# Altium PCB MiniTV.PcbDoc
Units mm, origin at the board's own origin, x right, y up, seen from the top; angles counter-clockwise.
Board outline 70.75 x 58.75 mm, 2 copper layers (Top Layer, Bottom Layer), stack 1.571 mm thick; 14 components, 15 nets, 76 pads, 1306 vias.
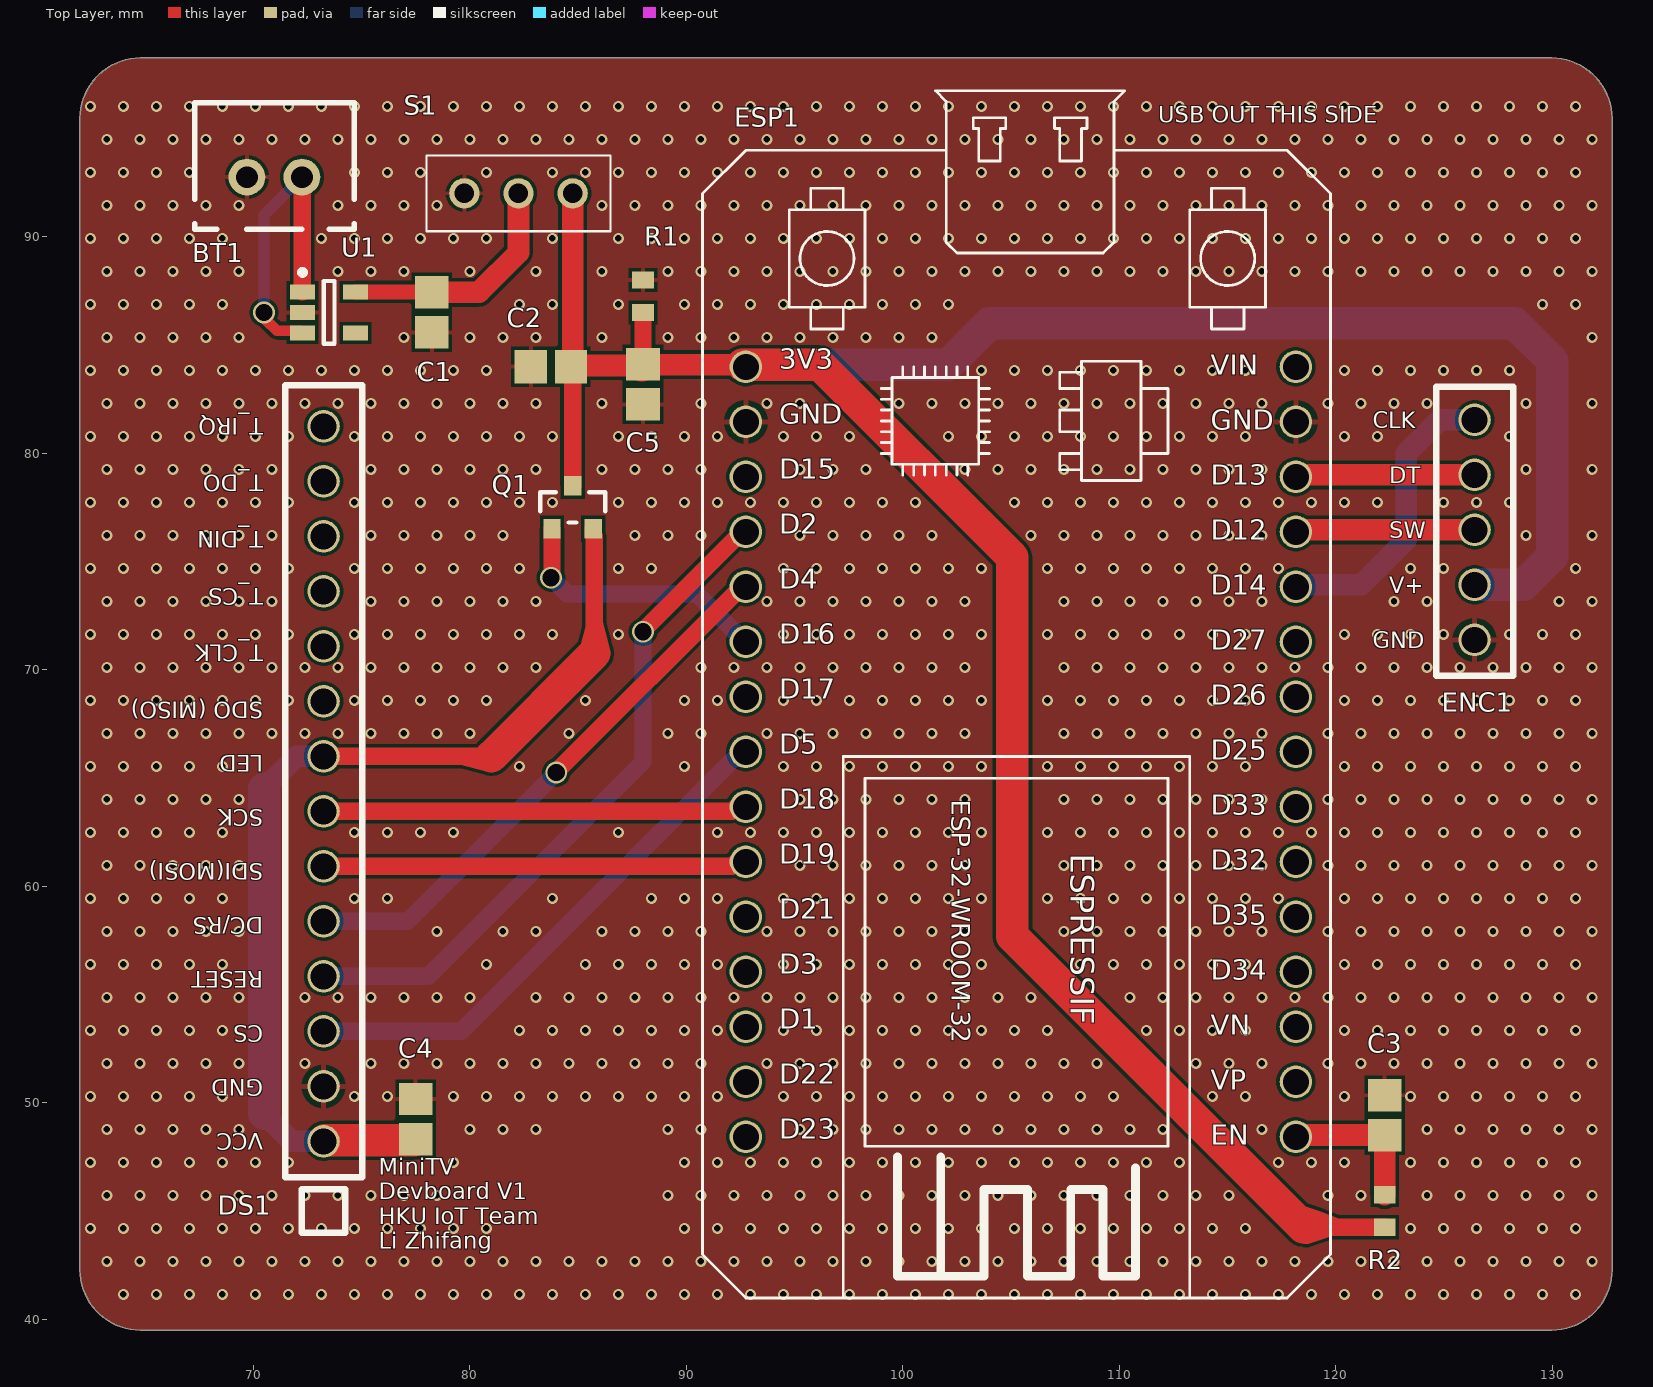
[diagram p0: Top Layer view]
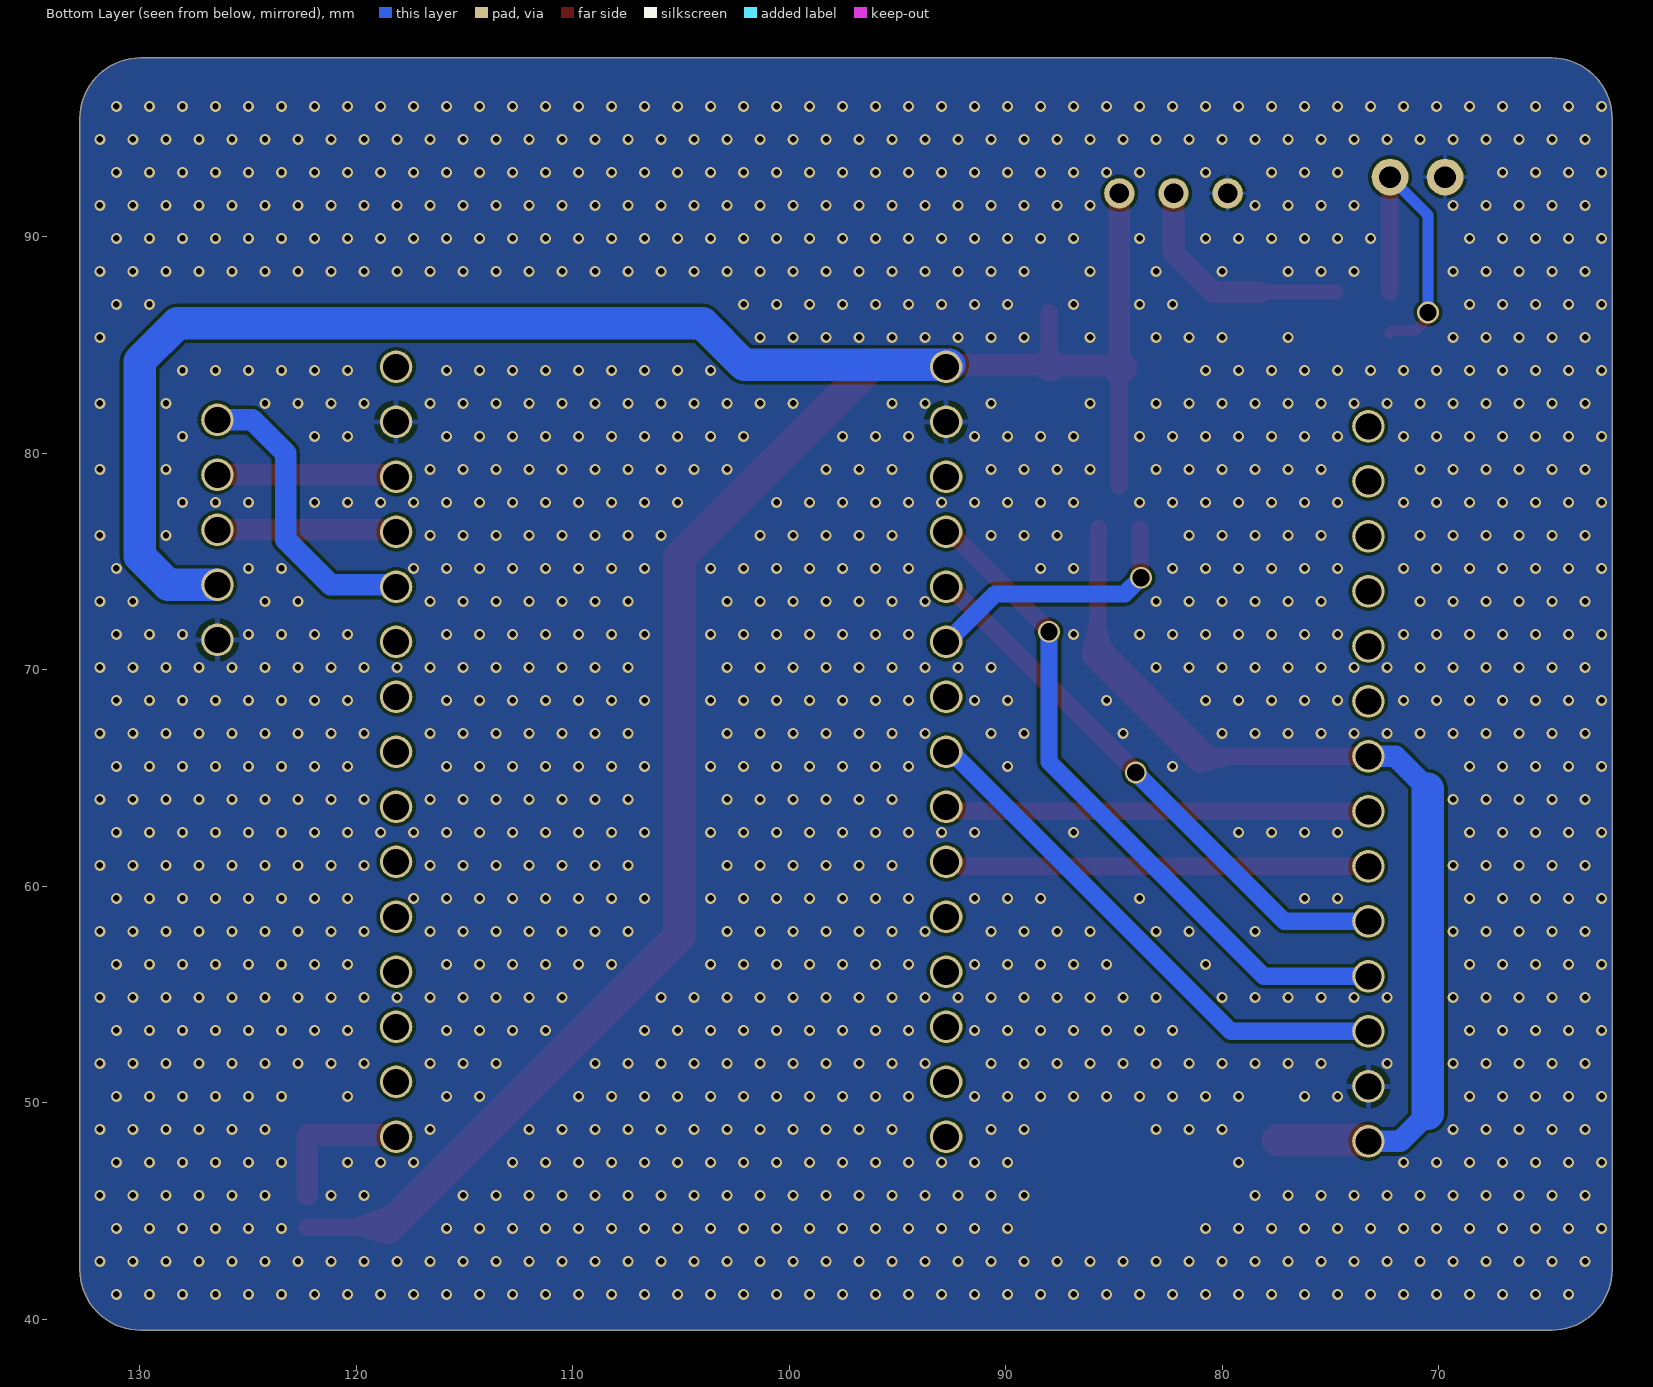
[diagram p1: Bottom Layer view, seen from below]

## Layer stack, top to bottom
Top Solder: solder mask 0.0102, Solder Resist, Dk 3.5
Top Layer: signal copper 0.0356
Dielectric 1: dielectric 1.5, FR-4, Dk 4.8
Bottom Layer: signal copper 0.0356
Bottom Solder: solder mask 0.0102, Solder Resist, Dk 3.5

## Board outline
62,42.29 62,95.46 cw(c64.79,95.46) 64.79,98.25 129.96,98.25 cw(c129.96,95.46) 132.75,95.46 132.75,42.29 cw(c129.96,42.29) 129.96,39.5 64.79,39.5 cw(c64.79,42.29)

## Design rules (kind name [scope] priority, off if disabled: settings)
Clearance [All] p1: gap=0.15 ignorepadtopadclearanceinfootprint=FALSE
DiffPairsRouting [All] p1: maxlimit=1 minlimit=0.127 mostfreqgap=0.2 toplayer_minwidth=0.127 toplayer_maxwidth=0.2 toplayer_prefwidth=0.2 bottomlayer_minwidth=0.127 bottomlayer_maxwidth=0.2 bottomlayer_prefwidth=0.2 maxuncoupledlength=12.7
Height [All] p1: minheight=0 maxheight=500 prefheight=12.7
HoleSize [All] p1: absolutevalues=TRUE maxlimit=6.3 minlimit=0.025 maxpercent=80.000 minpercent=20.000
MinimumSolderMaskSliver [All] p1: minsoldermaskwidth=0.04
PolygonConnect CertainComponents [InComponent('C0','C00') vs InNet('GND')] p1: connectstyle=Direct reliefconductorwidth=0.2 reliefentries=4 polygonreliefangle="90 Angle" airgapwidth=0.2 // force certain component to be conencted with relieft connection
PolygonConnect GND [InNet('GND')] p2: thpad.connectstyle=Relief thpad.reliefconductorwidth=0.2 thpad.reliefentries=4 thpad.polygonreliefangle="90 Angle" thpad.airgapwidth=0.15 smdpad.connectstyle=Relief smdpad.reliefconductorwidth=0.2 smdpad.reliefentries=4 smdpad.polygonreliefangle="90 Angle" smdpad.airgapwidth=0.15 via.connectstyle=Direct via.reliefconductorwidth=0.254 via.reliefentries=4 via.polygonreliefangle="90 Angle" via.airgapwidth=0.254
PolygonConnect [All] p3: connectstyle=Direct reliefconductorwidth=0.3 reliefentries=4 polygonreliefangle="90 Angle" airgapwidth=0.127
RoutingVias [All] p1: holewidth=0.3 width=0.5 viastyle="Through Hole" minholewidth=0.3 minwidth=0.5 maxholewidth=6 maxwidth=6.3
SilkToSilkClearance [All] p1: silktosilkclearance=0.04
SilkToSolderMaskClearance [IsPad] p1: minsilkscreentomaskgap=0.04 clearancetoexposedcopper=TRUE
SolderMaskExpansion [All] p1: expansion=0.102 istentingtop=FALSE
SupplyNets "Schematic Supply Nets_3" [InNet('GND')] p1: voltage=0.000
SupplyNets "Schematic Supply Nets_2" [InNet('VDD')] p2: voltage=0.000
SupplyNets "Schematic Supply Nets_1" [InNet('Vout')] p3: voltage=0.000
SupplyNets "Schematic Supply Nets" [InNet('3v3')] p4: voltage=0.000
Width [All] p1: maxlimit=3 minlimit=0.127 preferedwidth=0.2
24 further rules are at their usual default settings.

## Components (designator, comment, footprint, x,y, rotation, side; value= is the part's Value field where it differs from the comment)
BT1 "JST_XH_2P_2.54mm" JST_XH_2P_2.54mm 70.98,92.75 r0 top
C1 "10uF 0805" CAPC2013X145X48ML20T23 78.25,86.5 r90 top
C2 "4.7uF 0805" CAPC2013X145X48ML20T23 83.75,84 r0 top
C3 "4.7uF 0805" CAPC2013X145X48ML20T23 122.25,49.425 r90 top
C4 "0.1uF 0805" CAPC2013X145X48ML20T23 77.5,49.25 r270 top
C5 "0.1uF 0805" CAPC2013X145X48ML20T23 88,83.175 r270 top
DS1 "3.5inch TFT Display" "3.5inch SPI Display" 73.25,48.22 r180 top
ENC1 "Rotary Encoder" "Rotary Encoder" 126.405,81.54 r0 top
ESP1 "https://github.com/shridattdudhat" ESP32-DEVKITV1 92.75,83.99 r270 top
Q1 "(NPN) DMG2302UK-7" FP-SOT23-MFG 84.75,77.5 r90 top
R1 "100k 0603" RESC1608X55X25ML10T15 88,87.25 r90 top
R2 "10kΩ 0603" RESC1608X55X25ML10T15 122.25,45 r90 top
S1 "SS12D00G3" SS12D00G3 82.25,92 r0 top
U1 "ADP150AUJZ-3.3-R7" ADI-UJ-5_M 73.5,86.5 r0 top

## Footprints (in the part's own frame and the unit in brackets; to place one, negate y for a bottom-side part, rotate by r counter-clockwise, add the part's x,y. Pads: shape width x height; smd on the part's side, far side on the other; paste and mask are expansions set on the pad)
"3.5inch SPI Display" [mm]
  round 1.5 hole 1.2: 1(0,0) 2(0,-2.54) 3(0,-5.08) 4(0,-7.62) 5(0,-10.16) 6(0,-12.7) 7(0,-15.24) 8(0,-17.78) 9(0,-20.32) 10(0,-22.86) 11(0,-25.4) 12(0,-27.94) 13(0,-30.48) 14(0,-33.02)
  silkscreen extent -1.78,-34.93 1.78,1.65
ADI-UJ-5_M [mm] "SOT23, 5-Leads, Body 2.9x1.6mm, Pitch 0.95mm, IPC Low Density"
  rect 1.15x0.7 smd: 1(-1.225,0.95) 2(-1.225,0) 3(-1.225,-0.95) 4(1.225,-0.95) 5(1.225,0.95)
  silkscreen extent -1.35,-1.45 0.25,1.97, body extent -0.8,-1.45 0.8,1.45, height 1
CAPC2013X145X48ML20T23 [mm] "Chip Capacitor, 2-Leads, Body 2.00x1.25mm, IPC Low Density"
  rect 1.5x1.55 smd: 1(-0.925,0) 2(0.925,0)
  body extent -1.1,-0.72 1.1,0.72, height 1.45
ESP32-DEVKITV1 [mm]
  round 1.5 hole 1.2: 3V3(0,0) D1(30.48,0) D2(7.62,0) D3(27.94,0) D4(10.16,0) D5(17.78,0) D12(7.62,25.4) D13(5.08,25.4) D14(10.16,25.4) D15(5.08,0) D16(12.7,0) D17(15.24,0) D18(20.32,0) D19(22.86,0) D21(25.4,0) D22(33.02,0) D23(35.56,0) D25(17.78,25.4) D26(15.24,25.4) D27(12.7,25.4) D32(22.86,25.4) D33(20.32,25.4) D34(27.94,25.4) D35(25.4,25.4) EN(35.56,25.4) GND(2.54,25.4) GND@1(2.54,0) VIN(0,25.4) VN(30.48,25.4) VP(33.02,25.4)
  silkscreen extent -12.75,-2 43,27
FP-SOT23-MFG [mm]
  rect 0.9x0.8 smd paste+0 mask+0: 1(-1,0.95) 2(-1,-0.95) 3(1,0)
  silkscreen extent -0.7,-1.5 0.7,1.5, body extent -1.55,-1.6 1.55,1.6, height 0.25
JST_XH_2P_2.54mm [mm]
  round 1.7 hole 1 paste-2539.97 mask+0.051: 1(1.27,0) 2(-1.27,0)
  silkscreen extent -3.68,-2.41 3.68,3.43
RESC1608X55X25ML10T15 [mm] "Chip Resistor, 2-Leads, Body 1.60x0.80mm, IPC Low Density"
  rect 0.8x1 smd: 1(-0.75,0) 2(0.75,0)
  body extent -0.85,-0.45 0.85,0.45, height 0.55
"Rotary Encoder" [mm]
  round 1.5 hole 1.2: 1(0,0) 2(0,-2.54) 3(0,-5.08) 4(0,-7.62) 5(0,-10.16)
  silkscreen extent -1.78,-11.81 1.78,1.52
SS12D00G3 [mm]
  round 1.4 hole 0.9: 1(-2.5,0) 2(0,0) 3(2.5,0)
  silkscreen extent -4.25,-1.75 4.25,1.75, body extent -4.25,-1.75 4.25,1.75, height 6.88

## Part data
C1 C2 C3 C4 C5: library part CMP-2007-03205-1, Manufacturer=Vitramon, Part Number=VJ0805Y682KXAMT
ESP1: library part ESP32DEVKITV1, Package=ESP32-DEVKITV1, DeviceSetName=ESP32DEVKITV1, GateName_1=G$1, LibraryName=ESP32-DEVKITV1, SymbolName_1=ESP32-DEVKITV1
Q1: library part CMP-12801-000001-1, "MOSFET N-CH 20V 2.8A SOT23", Continuous Drain Current=2.8A, Drain To Source Breakdown Voltage=20V, Drain To Source Resistance=61mΩ, Gate To Source Voltage=12V, Input Capacitace At Vds="130pF @ 10V", Manufacturer="Diodes Inc.", Manufacturer Part Number=DMG2302UK-7, Max Forward Diode Voltage=1.2V, Max Junction Temp=+150°C, Package=SOT23, Power Dissipation=0.66W, Pulse Drain Current=12A, Temperature="-55°C to +150°C", Temperature Range Low=-55°C, Typ Forward Diode Voltage=0.7V, Automotive=Yes, Automotive Grade="Grade 0", Category=Trans, ComponentLink2Description=Datasheet, ComponentLink2URL=https://www.diodes.com/assets/Datasheets/DMG2302UK.pdf, Depletion Mode=False, Device Class L1="Discrete Semiconductors", Device Class L2=Transistors, Device Class L3=MOSFETs, Digikey Description="MOSFET N-CH 20V 2.8A SOT23", Drain To Source Voltage=20V, Footprint Url=https://www.diodes.com/assets/Package-Files/SOT23.pdf, Gate Charge At Vgs="2.8nC @ 10V", Height=1.1mm, Lead Free=Yes, Number Of Channels=1, Number Of N Channels=1, Octopart=https://octopart.com/dmg2302uk-7-diodes+inc.-73850182, Reverse Recovery Charge=0.5nC, Reverse Recovery Time=5.3ns, RoHS=TRUE, Rthja Max=192°C/W, Standoff Height=0.013mm, Temperature Range High=+150°C, Threshold Vgs Max=1V, Threshold Vgs Min=0.3V, Turn Off Delay Time=4.2ns, Turn On Delay Time=0.6ns
R1 R2: library part CMP-2000-04177-1, Manufacturer=Yageo, Part Number=RC0603FR-1020KL
S1: "Switch", Manufacturer_Name=Vimex, Datasheet Link=http://vimex.com/switches/techdocs/SS12D00-tech.pdf, Height=7mm, Manufacturer_Part_Number=SS12D00G3
U1: library part CMP-0786-00394-1, "Ultralow Noise, 150 mA CMOS Linear Regulator, 2.2 to 5.5 V Vin, 3.3 V Vout, Industrial, 5-pin SOT23 (UJ-5), Reel", Manufacturer="Analog Devices", Preset Vout Values (V)=3.3, Supply Current IGND @ Small Load=10uA, Code_JEDEC=MO-193-AB, ComponentLink1Description="Manufacturer URL", ComponentLink1URL=http://www.analog.com/en/index.html, ComponentLink2Description=Datasheet, ComponentLink2URL=http://www.analog.com/static/imported-files/data_sheets/ADP150.pdf, ComponentLink3Description="Package Specification", ComponentLink3URL=http:/www.analog.com/static/imported-files/packages/PKG_PDF/TSOT(UJ)/UJ_5.pdf, ComponentLink4Description="URL Link1", ComponentLink4URL="Product URL:http://www.analog.com/en/ADP150/productSearch.html", DatasheetVersion="Rev. A", Iout max=150mA, Mounting Technology="Surface Mount", PackageDescription="5-Pin Thin Small Outline Transistor Package, Body 2.9 x 1.6 mm, Pitch 0.95 mm", PackageReference=UJ-5, PackageVersion="100708-A, 10/2008", Packing=Reel, PartNumber=ADP150AUJZ-3.3-R7, Vin (max) (V)=5.5, Vin (min) (V)=2.2

## Via types
v1: diameter 0.5, hole 0.3, Top Layer to Bottom Layer, tented both sides, 1302 vias
v2: diameter 1, hole 0.8, Top Layer to Bottom Layer, tented both sides, 4 vias

## Nets (pads, with @x,y where several pads share a name; then routed paths per layer and width w, separated by ;. In a path a pad name is that pad's centre, name@x,y a point inside that pad or via, vN(x,y) a via of type N, cw(c..) or ccw(c..) an arc to the next point about the centre after c; other vN are vias at no path point)
3v3: C1.2 S1.2 U1.5 | length 11
  Top Layer w0.7: U1.5 78.225,87.45 C1.2
  Top Layer w1: C1.2 80.425,87.425 82.25,89.25 S1.2
GND: BT1.2 C1.1 C2.1 C3.2 C4.1 C5.2 DS1.2 ENC1.5 ESP1.GND ESP1.GND@1 R1.2 S1.1 U1.2
  other v1: 64.008,41.148 65.532,41.148 67.056,41.148 68.58,41.148 70.104,41.148 71.628,41.148 73.152,41.148 74.676,41.148 76.2,41.148 77.724,41.148 79.248,41.148 80.772,41.148 82.296,41.148 83.82,41.148 85.344,41.148 86.868,41.148 88.392,41.148 89.916,41.148 91.44,41.148 92.964,41.148 94.488,41.148 96.012,41.148 97.536,41.148 99.06,41.148 100.584,41.148 102.108,41.148 103.632,41.148 105.156,41.148 106.68,41.148 108.204,41.148 109.728,41.148 111.252,41.148 112.776,41.148 114.3,41.148 115.824,41.148 117.348,41.148 118.872,41.148 120.396,41.148 121.92,41.148 123.444,41.148 124.968,41.148 126.492,41.148 128.016,41.148 129.54,41.148 131.064,41.148 63.246,42.672 64.77,42.672 66.294,42.672 67.818,42.672 69.342,42.672 70.866,42.672 72.39,42.672 73.914,42.672 75.438,42.672 76.962,42.672 78.486,42.672 80.01,42.672 81.534,42.672 83.058,42.672 84.582,42.672 86.106,42.672 87.63,42.672 89.154,42.672 90.678,42.672 92.202,42.672 93.726,42.672 95.25,42.672 96.774,42.672 98.298,42.672 99.822,42.672 101.346,42.672 102.87,42.672 104.394,42.672 105.918,42.672 107.442,42.672 108.966,42.672 110.49,42.672 112.014,42.672 113.538,42.672 115.062,42.672 116.586,42.672 118.11,42.672 119.634,42.672 121.158,42.672 122.682,42.672 124.206,42.672 125.73,42.672 127.254,42.672 128.778,42.672 130.302,42.672 131.826,42.672 62.484,44.196 64.008,44.196 65.532,44.196 67.056,44.196 68.58,44.196 70.104,44.196 71.628,44.196 73.152,44.196 74.676,44.196 76.2,44.196 77.724,44.196 79.248,44.196 80.772,44.196 89.916,44.196 91.44,44.196 92.964,44.196 94.488,44.196 96.012,44.196 97.536,44.196 99.06,44.196 100.584,44.196 102.108,44.196 103.632,44.196 105.156,44.196 106.68,44.196 108.204,44.196 109.728,44.196 111.252,44.196 112.776,44.196 114.3,44.196 115.824,44.196 123.444,44.196 124.968,44.196 126.492,44.196 128.016,44.196 129.54,44.196 131.064,44.196 63.246,45.72 64.77,45.72 66.294,45.72 67.818,45.72 69.342,45.72 70.866,45.72 72.39,45.72 73.914,45.72 75.438,45.72 76.962,45.72 78.486,45.72 89.154,45.72 90.678,45.72 92.202,45.72 93.726,45.72 95.25,45.72 96.774,45.72 98.298,45.72 99.822,45.72 101.346,45.72 102.87,45.72 104.394,45.72 105.918,45.72 107.442,45.72 108.966,45.72 110.49,45.72 112.014,45.72 113.538,45.72 115.062,45.72 119.634,45.72 121.158,45.72 124.206,45.72 125.73,45.72 127.254,45.72 128.778,45.72 130.302,45.72 131.826,45.72 62.484,47.244 64.008,47.244 65.532,47.244 67.056,47.244 68.58,47.244 70.104,47.244 71.628,47.244 79.248,47.244 89.916,47.244 91.44,47.244 92.964,47.244 94.488,47.244 96.012,47.244 97.536,47.244 99.06,47.244 100.584,47.244 102.108,47.244 103.632,47.244 105.156,47.244 106.68,47.244 108.204,47.244 109.728,47.244 111.252,47.244 112.776,47.244 117.348,47.244 118.872,47.244 120.396,47.244 123.444,47.244 124.968,47.244 126.492,47.244 128.016,47.244 129.54,47.244 131.064,47.244 63.246,48.768 64.77,48.768 66.294,48.768 67.818,48.768 69.342,48.768 80.01,48.768 81.534,48.768 83.058,48.768 89.154,48.768 90.678,48.768 95.25,48.768 96.774,48.768 98.298,48.768 99.822,48.768 101.346,48.768 102.87,48.768 104.394,48.768 105.918,48.768 107.442,48.768 108.966,48.768 110.49,48.768 112.014,48.768 116.586,48.768 124.206,48.768 125.73,48.768 127.254,48.768 128.778,48.768 130.302,48.768 131.826,48.768 62.484,50.292 64.008,50.292 65.532,50.292 67.056,50.292 68.58,50.292 74.676,50.292 76.2,50.292 79.248,50.292 80.772,50.292 82.296,50.292 83.82,50.292 85.344,50.292 86.868,50.292 88.392,50.292 89.916,50.292 91.44,50.292 94.488,50.292 96.012,50.292 97.536,50.292 99.06,50.292 100.584,50.292 102.108,50.292 103.632,50.292 105.156,50.292 106.68,50.292 108.204,50.292 109.728,50.292 114.3,50.292 115.824,50.292 120.396,50.292 123.444,50.292 124.968,50.292 126.492,50.292 128.016,50.292 129.54,50.292 131.064,50.292 63.246,51.816 64.77,51.816 66.294,51.816 67.818,51.816 69.342,51.816 72.39,51.816 75.438,51.816 76.962,51.816 78.486,51.816 80.01,51.816 81.534,51.816 83.058,51.816 84.582,51.816 86.106,51.816 87.63,51.816 89.154,51.816 90.678,51.816 93.726,51.816 95.25,51.816 96.774,51.816 98.298,51.816 99.822,51.816 101.346,51.816 102.87,51.816 104.394,51.816 105.918,51.816 107.442,51.816 108.966,51.816 113.538,51.816 115.062,51.816 116.586,51.816 119.634,51.816 121.158,51.816 122.682,51.816 124.206,51.816 125.73,51.816 127.254,51.816 128.778,51.816 130.302,51.816 131.826,51.816 62.484,53.34 64.008,53.34 65.532,53.34 67.056,53.34 68.58,53.34 82.296,53.34 83.82,53.34 85.344,53.34 86.868,53.34 88.392,53.34 89.916,53.34 91.44,53.34 94.488,53.34 96.012,53.34 97.536,53.34 99.06,53.34 100.584,53.34 102.108,53.34 103.632,53.34 105.156,53.34 106.68,53.34 111.252,53.34 112.776,53.34 114.3,53.34 115.824,53.34 120.396,53.34 121.92,53.34 123.444,53.34 124.968,53.34 126.492,53.34 128.016,53.34 129.54,53.34 131.064,53.34 63.246,54.864 64.77,54.864 66.294,54.864 67.818,54.864 69.342,54.864 72.39,54.864 73.914,54.864 75.438,54.864 76.962,54.864 78.486,54.864 80.01,54.864 83.058,54.864 84.582,54.864 86.106,54.864 87.63,54.864 89.154,54.864 90.678,54.864 92.202,54.864 93.726,54.864 95.25,54.864 96.774,54.864 98.298,54.864 99.822,54.864 101.346,54.864 102.87,54.864 104.394,54.864 105.918,54.864 110.49,54.864 112.014,54.864 113.538,54.864 115.062,54.864 116.586,54.864 118.11,54.864 119.634,54.864 121.158,54.864 122.682,54.864 124.206,54.864 125.73,54.864 127.254,54.864 128.778,54.864 130.302,54.864 131.826,54.864 62.484,56.388 64.008,56.388 65.532,56.388 67.056,56.388 68.58,56.388 80.772,56.388 85.344,56.388 86.868,56.388 88.392,56.388 89.916,56.388 91.44,56.388 94.488,56.388 96.012,56.388 97.536,56.388 99.06,56.388 100.584,56.388 102.108,56.388 103.632,56.388 108.204,56.388 109.728,56.388 111.252,56.388 112.776,56.388 114.3,56.388 115.824,56.388 120.396,56.388 121.92,56.388 123.444,56.388 124.968,56.388 126.492,56.388 128.016,56.388 129.54,56.388 131.064,56.388 63.246,57.912 64.77,57.912 66.294,57.912 67.818,57.912 69.342,57.912 78.486,57.912 81.534,57.912 83.058,57.912 86.106,57.912 87.63,57.912 89.154,57.912 90.678,57.912 93.726,57.912 95.25,57.912 96.774,57.912 98.298,57.912 99.822,57.912 101.346,57.912 102.87,57.912 107.442,57.912 108.966,57.912 110.49,57.912 112.014,57.912 113.538,57.912 115.062,57.912 116.586,57.912 119.634,57.912 121.158,57.912 122.682,57.912 124.206,57.912 125.73,57.912 127.254,57.912 128.778,57.912 130.302,57.912 131.826,57.912 62.484,59.436 64.008,59.436 65.532,59.436 67.056,59.436 68.58,59.436 74.676,59.436 76.2,59.436 83.82,59.436 88.392,59.436 89.916,59.436 91.44,59.436 94.488,59.436 96.012,59.436 97.536,59.436 99.06,59.436 100.584,59.436 102.108,59.436 103.632,59.436 106.68,59.436 108.204,59.436 109.728,59.436 111.252,59.436 112.776,59.436 114.3,59.436 115.824,59.436 117.348,59.436 120.396,59.436 121.92,59.436 123.444,59.436 124.968,59.436 126.492,59.436 128.016,59.436 129.54,59.436 131.064,59.436 63.246,60.96 64.77,60.96 66.294,60.96 67.818,60.96 69.342,60.96 95.25,60.96 96.774,60.96 98.298,60.96 99.822,60.96 101.346,60.96 102.87,60.96 107.442,60.96 108.966,60.96 110.49,60.96 112.014,60.96 113.538,60.96 115.062,60.96 116.586,60.96 119.634,60.96 121.158,60.96 122.682,60.96 124.206,60.96 125.73,60.96 127.254,60.96 128.778,60.96 130.302,60.96 131.826,60.96 62.484,62.484 64.008,62.484 65.532,62.484 67.056,62.484 68.58,62.484 74.676,62.484 76.2,62.484 77.724,62.484 79.248,62.484 86.868,62.484 91.44,62.484 92.964,62.484 94.488,62.484 96.012,62.484 97.536,62.484 99.06,62.484 100.584,62.484 102.108,62.484 103.632,62.484 106.68,62.484 108.204,62.484 109.728,62.484 111.252,62.484 112.776,62.484 114.3,62.484 115.824,62.484 117.348,62.484 118.872,62.484 120.396,62.484 121.92,62.484 123.444,62.484 124.968,62.484 126.492,62.484 128.016,62.484 129.54,62.484 131.064,62.484 63.246,64.008 64.77,64.008 66.294,64.008 67.818,64.008 69.342,64.008 95.25,64.008 96.774,64.008 98.298,64.008 99.822,64.008 101.346,64.008 102.87,64.008 107.442,64.008 108.966,64.008 110.49,64.008 112.014,64.008 113.538,64.008 115.062,64.008 116.586,64.008 119.634,64.008 121.158,64.008 122.682,64.008 124.206,64.008 125.73,64.008 127.254,64.008 128.778,64.008 130.302,64.008 131.826,64.008 62.484,65.532 64.008,65.532 65.532,65.532 67.056,65.532 68.58,65.532 82.296,65.532 89.916,65.532 94.488,65.532 96.012,65.532 97.536,65.532 99.06,65.532 100.584,65.532 102.108,65.532 103.632,65.532 106.68,65.532 108.204,65.532 109.728,65.532 111.252,65.532 112.776,65.532 114.3,65.532 115.824,65.532 120.396,65.532 121.92,65.532 123.444,65.532 124.968,65.532 126.492,65.532 128.016,65.532 129.54,65.532 131.064,65.532 63.246,67.056 64.77,67.056 66.294,67.056 67.818,67.056 69.342,67.056 70.866,67.056 72.39,67.056 73.914,67.056 75.438,67.056 76.962,67.056 78.486,67.056 80.01,67.056 84.582,67.056 89.154,67.056 90.678,67.056 93.726,67.056 95.25,67.056 96.774,67.056 98.298,67.056 99.822,67.056 101.346,67.056 102.87,67.056 107.442,67.056 108.966,67.056 110.49,67.056 112.014,67.056 113.538,67.056 115.062,67.056 116.586,67.056 119.634,67.056 121.158,67.056 122.682,67.056 124.206,67.056 125.73,67.056 127.254,67.056 128.778,67.056 130.302,67.056 131.826,67.056 62.484,68.58 64.008,68.58 65.532,68.58 67.056,68.58 68.58,68.58 70.104,68.58 71.628,68.58 74.676,68.58 76.2,68.58 77.724,68.58 79.248,68.58 80.772,68.58 85.344,68.58 89.916,68.58 91.44,68.58 94.488,68.58 96.012,68.58 97.536,68.58 99.06,68.58 100.584,68.58 102.108,68.58 103.632,68.58 106.68,68.58 108.204,68.58 109.728,68.58 111.252,68.58 112.776,68.58 114.3,68.58 115.824,68.58 120.396,68.58 121.92,68.58 123.444,68.58 124.968,68.58 126.492,68.58 128.016,68.58 129.54,68.58 131.064,68.58 63.246,70.104 64.77,70.104 66.294,70.104 67.818,70.104 69.342,70.104 70.866,70.104 72.39,70.104 73.914,70.104 75.438,70.104 76.962,70.104 78.486,70.104 80.01,70.104 81.534,70.104 83.058,70.104 90.678,70.104 92.202,70.104 93.726,70.104 95.25,70.104 96.774,70.104 98.298,70.104 99.822,70.104 101.346,70.104 102.87,70.104 107.442,70.104 108.966,70.104 110.49,70.104 112.014,70.104 113.538,70.104 115.062,70.104 116.586,70.104 118.11,70.104 119.634,70.104 121.158,70.104 122.682,70.104 124.206,70.104 125.73,70.104 127.254,70.104 128.778,70.104 130.302,70.104 131.826,70.104 62.484,71.628 64.008,71.628 65.532,71.628 67.056,71.628 68.58,71.628 70.104,71.628 71.628,71.628 74.676,71.628 76.2,71.628 77.724,71.628 79.248,71.628 80.772,71.628 82.296,71.628 83.82,71.628 86.868,71.628 94.488,71.628 96.012,71.628 97.536,71.628 99.06,71.628 100.584,71.628 102.108,71.628 103.632,71.628 106.68,71.628 108.204,71.628 109.728,71.628 111.252,71.628 112.776,71.628 114.3,71.628 115.824,71.628 120.396,71.628 121.92,71.628 123.444,71.628 124.968,71.628 128.016,71.628 129.54,71.628 131.064,71.628 63.246,73.152 64.77,73.152 66.294,73.152 67.818,73.152 69.342,73.152 70.866,73.152 75.438,73.152 76.962,73.152 78.486,73.152 80.01,73.152 81.534,73.152 83.058,73.152 93.726,73.152 95.25,73.152 96.774,73.152 98.298,73.152 99.822,73.152 101.346,73.152 102.87,73.152 107.442,73.152 108.966,73.152 110.49,73.152 112.014,73.152 113.538,73.152 115.062,73.152 116.586,73.152 122.682,73.152 124.206,73.152 130.302,73.152 131.826,73.152 62.484,74.676 64.008,74.676 65.532,74.676 67.056,74.676 68.58,74.676 70.104,74.676 71.628,74.676 74.676,74.676 76.2,74.676 77.724,74.676 79.248,74.676 80.772,74.676 82.296,74.676 86.868,74.676 88.392,74.676 94.488,74.676 96.012,74.676 97.536,74.676 99.06,74.676 100.584,74.676 102.108,74.676 103.632,74.676 106.68,74.676 108.204,74.676 109.728,74.676 111.252,74.676 112.776,74.676 114.3,74.676 115.824,74.676 117.348,74.676 123.444,74.676 124.968,74.676 131.064,74.676 63.246,76.2 64.77,76.2 66.294,76.2 67.818,76.2 69.342,76.2 70.866,76.2 75.438,76.2 76.962,76.2 78.486,76.2 80.01,76.2 81.534,76.2 87.63,76.2 89.154,76.2 90.678,76.2 95.25,76.2 96.774,76.2 98.298,76.2 99.822,76.2 101.346,76.2 105.918,76.2 107.442,76.2 108.966,76.2 110.49,76.2 112.014,76.2 113.538,76.2 115.062,76.2 116.586,76.2 128.778,76.2 131.826,76.2 62.484,77.724 64.008,77.724 65.532,77.724 67.056,77.724 68.58,77.724 70.104,77.724 71.628,77.724 74.676,77.724 76.2,77.724 77.724,77.724 79.248,77.724 80.772,77.724 82.296,77.724 83.82,77.724 86.868,77.724 88.392,77.724 89.916,77.724 91.44,77.724 92.964,77.724 94.488,77.724 96.012,77.724 97.536,77.724 99.06,77.724 100.584,77.724 105.156,77.724 106.68,77.724 108.204,77.724 109.728,77.724 111.252,77.724 112.776,77.724 114.3,77.724 115.824,77.724 117.348,77.724 118.872,77.724 120.396,77.724 121.92,77.724 124.968,77.724 126.492,77.724 128.016,77.724 63.246,79.248 64.77,79.248 66.294,79.248 67.818,79.248 69.342,79.248 70.866,79.248 75.438,79.248 76.962,79.248 78.486,79.248 80.01,79.248 81.534,79.248 83.058,79.248 86.106,79.248 87.63,79.248 89.154,79.248 90.678,79.248 95.25,79.248 96.774,79.248 98.298,79.248 102.87,79.248 104.394,79.248 105.918,79.248 107.442,79.248 108.966,79.248 110.49,79.248 112.014,79.248 113.538,79.248 115.062,79.248 116.586,79.248 128.778,79.248 131.826,79.248 62.484,80.772 64.008,80.772 65.532,80.772 67.056,80.772 68.58,80.772 70.104,80.772 71.628,80.772 74.676,80.772 76.2,80.772 77.724,80.772 79.248,80.772 80.772,80.772 82.296,80.772 83.82,80.772 86.868,80.772 88.392,80.772 89.916,80.772 91.44,80.772 94.488,80.772 96.012,80.772 97.536,80.772 102.108,80.772 103.632,80.772 105.156,80.772 106.68,80.772 108.204,80.772 109.728,80.772 111.252,80.772 112.776,80.772 114.3,80.772 115.824,80.772 120.396,80.772 121.92,80.772 128.016,80.772 63.246,82.296 64.77,82.296 66.294,82.296 67.818,82.296 69.342,82.296 70.866,82.296 72.39,82.296 73.914,82.296 75.438,82.296 76.962,82.296 78.486,82.296 80.01,82.296 81.534,82.296 83.058,82.296 86.106,82.296 90.678,82.296 93.726,82.296 95.25,82.296 99.822,82.296 101.346,82.296 102.87,82.296 104.394,82.296 105.918,82.296 107.442,82.296 108.966,82.296 110.49,82.296 112.014,82.296 113.538,82.296 115.062,82.296 116.586,82.296 119.634,82.296 121.158,82.296 122.682,82.296 124.206,82.296 128.778,82.296 131.826,82.296 62.484,83.82 64.008,83.82 65.532,83.82 67.056,83.82 68.58,83.82 70.104,83.82 71.628,83.82 73.152,83.82 74.676,83.82 76.2,83.82 77.724,83.82 79.248,83.82 80.772,83.82 103.632,83.82 105.156,83.82 106.68,83.82 108.204,83.82 109.728,83.82 111.252,83.82 112.776,83.82 114.3,83.82 115.824,83.82 120.396,83.82 121.92,83.82 123.444,83.82 124.968,83.82 126.492,83.82 128.016,83.82 63.246,85.344 64.77,85.344 66.294,85.344 67.818,85.344 69.342,85.344 76.962,85.344 80.01,85.344 81.534,85.344 83.058,85.344 86.106,85.344 89.154,85.344 90.678,85.344 92.202,85.344 93.726,85.344 95.25,85.344 96.774,85.344 98.298,85.344 99.822,85.344 101.346,85.344 131.826,85.344 62.484,86.868 64.008,86.868 65.532,86.868 67.056,86.868 68.58,86.868 82.296,86.868 83.82,86.868 86.868,86.868 89.916,86.868 91.44,86.868 92.964,86.868 94.488,86.868 96.012,86.868 97.536,86.868 99.06,86.868 100.584,86.868 102.108,86.868 129.54,86.868 131.064,86.868 63.246,88.392 64.77,88.392 66.294,88.392 67.818,88.392 69.342,88.392 73.914,88.392 75.438,88.392 76.962,88.392 80.01,88.392 83.058,88.392 86.106,88.392 89.154,88.392 90.678,88.392 92.202,88.392 93.726,88.392 95.25,88.392 96.774,88.392 98.298,88.392 99.822,88.392 101.346,88.392 102.87,88.392 104.394,88.392 105.918,88.392 107.442,88.392 108.966,88.392 110.49,88.392 112.014,88.392 113.538,88.392 115.062,88.392 116.586,88.392 118.11,88.392 119.634,88.392 121.158,88.392 122.682,88.392 124.206,88.392 125.73,88.392 127.254,88.392 128.778,88.392 130.302,88.392 131.826,88.392 62.484,89.916 64.008,89.916 65.532,89.916 67.056,89.916 68.58,89.916 73.152,89.916 74.676,89.916 76.2,89.916 77.724,89.916 79.248,89.916 80.772,89.916 83.82,89.916 86.868,89.916 88.392,89.916 89.916,89.916 91.44,89.916 92.964,89.916 94.488,89.916 96.012,89.916 97.536,89.916 99.06,89.916 100.584,89.916 102.108,89.916 103.632,89.916 105.156,89.916 106.68,89.916 108.204,89.916 109.728,89.916 111.252,89.916 112.776,89.916 114.3,89.916 115.824,89.916 117.348,89.916 118.872,89.916 120.396,89.916 121.92,89.916 123.444,89.916 124.968,89.916 126.492,89.916 128.016,89.916 129.54,89.916 131.064,89.916 63.246,91.44 64.77,91.44 66.294,91.44 67.818,91.44 69.342,91.44 73.914,91.44 75.438,91.44 76.962,91.44 78.486,91.44 86.106,91.44 87.63,91.44 89.154,91.44 90.678,91.44 92.202,91.44 93.726,91.44 95.25,91.44 96.774,91.44 98.298,91.44 99.822,91.44 101.346,91.44 102.87,91.44 104.394,91.44 105.918,91.44 107.442,91.44 108.966,91.44 110.49,91.44 112.014,91.44 113.538,91.44 115.062,91.44 116.586,91.44 118.11,91.44 119.634,91.44 121.158,91.44 122.682,91.44 124.206,91.44 125.73,91.44 127.254,91.44 128.778,91.44 130.302,91.44 131.826,91.44 62.484,92.964 64.008,92.964 65.532,92.964 67.056,92.964 74.676,92.964 76.2,92.964 77.724,92.964 80.772,92.964 83.82,92.964 85.344,92.964 86.868,92.964 88.392,92.964 89.916,92.964 91.44,92.964 92.964,92.964 94.488,92.964 96.012,92.964 97.536,92.964 99.06,92.964 100.584,92.964 102.108,92.964 103.632,92.964 105.156,92.964 106.68,92.964 108.204,92.964 109.728,92.964 111.252,92.964 112.776,92.964 114.3,92.964 115.824,92.964 117.348,92.964 118.872,92.964 120.396,92.964 121.92,92.964 123.444,92.964 124.968,92.964 126.492,92.964 128.016,92.964 129.54,92.964 131.064,92.964 63.246,94.488 64.77,94.488 66.294,94.488 67.818,94.488 69.342,94.488 70.866,94.488 72.39,94.488 73.914,94.488 75.438,94.488 76.962,94.488 78.486,94.488 80.01,94.488 81.534,94.488 83.058,94.488 84.582,94.488 86.106,94.488 87.63,94.488 89.154,94.488 90.678,94.488 92.202,94.488 93.726,94.488 95.25,94.488 96.774,94.488 98.298,94.488 99.822,94.488 101.346,94.488 102.87,94.488 104.394,94.488 105.918,94.488 107.442,94.488 108.966,94.488 110.49,94.488 112.014,94.488 113.538,94.488 115.062,94.488 116.586,94.488 118.11,94.488 119.634,94.488 121.158,94.488 122.682,94.488 124.206,94.488 125.73,94.488 127.254,94.488 128.778,94.488 130.302,94.488 131.826,94.488 62.484,96.012 64.008,96.012 65.532,96.012 67.056,96.012 68.58,96.012 70.104,96.012 71.628,96.012 73.152,96.012 74.676,96.012 76.2,96.012 77.724,96.012 79.248,96.012 80.772,96.012 82.296,96.012 83.82,96.012 85.344,96.012 86.868,96.012 88.392,96.012 89.916,96.012 91.44,96.012 92.964,96.012 94.488,96.012 96.012,96.012 97.536,96.012 99.06,96.012 100.584,96.012 102.108,96.012 103.632,96.012 105.156,96.012 106.68,96.012 108.204,96.012 109.728,96.012 111.252,96.012 112.776,96.012 114.3,96.012 115.824,96.012 117.348,96.012 118.872,96.012 120.396,96.012 121.92,96.012 123.444,96.012 124.968,96.012 126.492,96.012 128.016,96.012 129.54,96.012 131.064,96.012
NetBT1_1: BT1.1 U1.1 U1.3 | length 14.6
  Top Layer w0.5: v2(70.5,86.5) 70.596,86.404 70.596,86.154 71.1,85.65 72.175,85.65 U1.3
  Top Layer w0.8: BT1.1 72.263,92.737 U1.1@72.263,87.462 ; U1.1@72.263,87.45 U1.1@72.263,87.462 ; U1.1 U1.1@72.263,87.462
  Bottom Layer w0.5: v2(70.5,86.5) 70.5,91 BT1.1
NetC3_1: C3.1 ESP1.EN R2.2 | length 7
  Top Layer w1: ESP1.EN@118,48.52 118.01,48.51 122.24,48.51 C3.1 R2.2
NetDS1_3: DS1.3 ESP1.D5 | length 24.7
  Bottom Layer w0.8: DS1.3 79.6,53.3 ESP1.D5@92.6,66.3
NetDS1_4: DS1.4 ESP1.D2 | length 31.5
  Top Layer w0.8: v2(88,71.75) 88,71.804 92.6,76.404 ESP1.D2@92.6,76.46
  Bottom Layer w0.8: DS1.4 78.09,55.84 88,65.75 v2(88,71.75)
NetDS1_5: DS1.5 ESP1.D4 | length 25.8
  Top Layer w0.8: v2(84,65.25) 84,65.285 92.6,73.885 ESP1.D4@92.6,73.92
  Bottom Layer w0.8: DS1.5 77.13,58.38 v2(84,65.25)
NetDS1_6: DS1.6 ESP1.D19 | length 19.5
  Top Layer w0.8: DS1.6 92.111,60.92 92.411,61.22 ESP1.D19@92.6,61.22
NetDS1_7: DS1.7 ESP1.D18 | length 19.5
  Top Layer w0.8: DS1.7 92.111,63.46 92.411,63.76 ESP1.D18@92.6,63.76
NetENC1_1: ENC1.1 ESP1.D14 | length 13.9
  Bottom Layer w1: ESP1.D14@118,73.92 121.17,73.92 123.25,76 123.25,80 124.79,81.54 ENC1.1
NetENC1_2: ENC1.2 ESP1.D13 | length 8.4
  Top Layer w1: ESP1.D13@118,79 ENC1.2
NetENC1_3: ENC1.3 ESP1.D12 | length 8.4
  Top Layer w1: ESP1.D12@118,76.46 ENC1.3
NetESP1_D16: ESP1.D16 Q1.1 | length 12.3
  Top Layer w0.8: v2(83.75,74.25) 83.75,74.304 83.8,74.354 Q1.1
  Bottom Layer w0.8: v2(83.75,74.25) 84.5,73.5 90.48,73.5 ESP1.D16@92.6,71.38
VDD: C4.2 DS1.1 DS1.8 Q1.2 | length 46.2
  Top Layer w0.8: DS1.1 DS1.1@73.303,48.273 ; DS1.8 81,66 ; C4.2@77.448,48.273 C4.2 ; Q1.2@85.7,76.504 85.7,76.216 85.75,76.166 85.75,70.75
  Top Layer w1.5: DS1.1@73.303,48.273 C4.2@77.448,48.273 ; 81,66 85.75,70.75
  Bottom Layer w1: 70.5,49.5 71.78,48.22 DS1.1 ; 70.5,64.5 72,66 DS1.8
  Bottom Layer w1.5: 70.5,49.5 70.5,64.5
Vout: C2.2 C5.1 ENC1.4 ESP1.3V3 Q1.3 R1.1 R2.1 S1.3 | length 131.9
  Top Layer w0.8: Q1.3 C2.2@84.75,83.925 ; C5.1 R1.1 ; 118.5,44.25 R2.1
  Top Layer w1: C2.2@84.725,84.05 C5.1@87.95,84.05 ; C2.2@84.75,84.4 S1.3 ; C5.1@88.01,84.09 ESP1.3V3@92.59,84.09
  Top Layer w1.5: C2.2 C2.2@84.75,83.925 ; C5.1@87.95,84.05 C5.1 C5.1@88.01,84.09 ; ESP1.3V3@92.59,84.09 92.6,84.08 96.17,84.08 105.058,75.192 105.058,57.692 118.5,44.25
  Bottom Layer w1.5: ESP1.3V3@92.6,84.08 102.08,84.08 104,86 128.25,86 130,84.25 130,75.25 128.67,73.92 ENC1.4
pads on no net: DS1.9 DS1.10 DS1.11 DS1.12 DS1.13 DS1.14 ESP1.D1 ESP1.D3 ESP1.D15 ESP1.D17 ESP1.D21 ESP1.D22 ESP1.D23 ESP1.D25 ESP1.D26 ESP1.D27 ESP1.D32 ESP1.D33 ESP1.D34 ESP1.D35 ESP1.VIN ESP1.VN ESP1.VP U1.4

## Polygon pours and split planes (outlines as drawn)
GND on Top Layer "NONET_L-01_P-001" (solid, pour order 0): 62,42.29 62,95.46 cw(c64.79,95.46) 64.79,98.25 129.96,98.25 cw(c129.96,95.46) 132.75,95.46 132.75,42.29 cw(c129.96,42.29) 129.96,39.5 64.79,39.5 cw(c64.79,42.29)
GND on Bottom Layer "NONET_L-01_P-001" (solid, pour order 1): 62,42.29 62,95.46 cw(c64.79,95.46) 64.79,98.25 129.96,98.25 cw(c129.96,95.46) 132.75,95.46 132.75,42.29 cw(c129.96,42.29) 129.96,39.5 64.79,39.5 cw(c64.79,42.29)

## Other copper
Top Layer:
  region net Vout: 118.5,45.25 119.25,45 120.5,44.5 120.25,44 119.5,43.75 118.75,43.5 118.5,43.5
  region net VDD: 81,65.25 79.4,65.65 79.75,66 80.75,66
  region net VDD: 86.5,70.75 85.5,70.75 85.125,71.125 85.5,72.5 86,72.75

## Silkscreen, mask and mechanical layers (free items; w line width, h text height)
Top Overlay:
  lines w0.3: 72.25,44 74.25,44 74.25,46 72.25,46 72.25,44
  text "USB OUT THIS SIDE" at 111.8,95.25 h0.76
  text "MiniTV  / Devboard V1 / HKU IoT Team / Li Zhifang" at 75.8,43.25 h0.76
Mechanical 1:
  lines w0.5: 71.059,98 129.96,98 cw(c129.96,95.46) 132.5,95.46 132.5,48 132.5,42.29 cw(c129.96,42.29) 129.96,39.75 68.75,39.75 64.79,39.75 cw(c64.79,42.29) 62.25,42.29 62.25,93.5 62.25,95.46 cw(c64.79,95.46) 64.79,98 71.75,98
Top Courtyard:
  text "OFF" at 78.965,95.254 h0.76
  text "ON" at 84.226,95.254 h0.76

## Text inside footprints (layer, text, board x,y; h text height)
DS1: Top Overlay "T_IRQ" at 70.456,81.621 h0.76 r180; Top Overlay "T_DO" at 70.456,79.003 h0.76 r180; Top Overlay "T_DIN" at 70.456,76.385 h0.76 r180; Top Overlay "T_CS" at 70.456,73.767 h0.76 r180; Top Overlay "T_CLK" at 70.456,71.149 h0.76 r180; Top Overlay "SDO (MISO)" at 70.456,68.53 h0.76 r180; Top Overlay "LED" at 70.456,66.039 h0.76 r180; Top Overlay "SCK" at 70.456,63.548 h0.76 r180; Top Overlay "SDI(MOSI)" at 70.456,61.057 h0.76 r180; Top Overlay "DC/RS" at 70.456,58.566 h0.76 r180; Top Overlay "RESET" at 70.456,56.075 h0.76 r180; Top Overlay "CS" at 70.456,53.583 h0.76 r180; Top Overlay "GND" at 70.456,51.092 h0.76 r180; Top Overlay "VCC" at 70.456,48.601 h0.76 r180
ENC1: Top Overlay "GND" at 121.706,70.999 h0.76; Top Overlay "V+" at 122.468,73.539 h0.76; Top Overlay "SW" at 122.468,76.079 h0.76; Top Overlay "DT" at 122.468,78.619 h0.76; Top Overlay "CLK" at 121.706,81.159 h0.76
ESP1: Top Overlay "3V3" at 94.29,83.59 h1.57; Top Overlay "VIN" at 114.22,83.32 h1.57; Top Overlay "GND" at 94.29,81.05 h1.57; Top Overlay "D4" at 94.29,73.43 h1.57; Top Overlay "D2" at 94.29,75.97 h1.57; Top Overlay "D1" at 94.29,53.11 h1.57; Top Overlay "D3" at 94.29,55.65 h1.57; Top Overlay "D5" at 94.29,65.81 h1.57; Top Overlay "D17" at 94.29,68.35 h1.57; Top Overlay "D22" at 94.29,50.57 h1.57; Top Overlay "D21" at 94.29,58.19 h1.57; Top Overlay "D18" at 94.29,63.27 h1.57; Top Overlay "D23" at 94.29,48.03 h1.57; Top Overlay "D15" at 94.29,78.51 h1.57; Top Overlay "D19" at 94.29,60.73 h1.57; Top Overlay "D16" at 94.29,70.89 h1.57; Top Overlay "ESP-32-WROOM-32" at 102.25,63.99 h0.86 r270; Top Overlay "GND" at 114.22,80.78 h1.57; Top Overlay "D14" at 114.22,73.16 h1.57; Top Overlay "D27" at 114.22,70.62 h1.57; Top Overlay "D12" at 114.22,75.7 h1.57; Top Overlay "D13" at 114.22,78.24 h1.57; Top Overlay "D26" at 114.22,68.08 h1.57; Top Overlay "ESPRESSIF" at 107.75,61.49 h1.08 r270; Top Overlay "EN" at 114.22,47.76 h1.57; Top Overlay "VP" at 114.22,50.3 h1.57; Top Overlay "VN" at 114.22,52.84 h1.57; Top Overlay "D34" at 114.22,55.38 h1.57; Top Overlay "D32" at 114.22,60.46 h1.57; Top Overlay "D25" at 114.22,65.54 h1.57; Top Overlay "D33" at 114.22,63 h1.57; Top Overlay "D35" at 114.22,57.92 h1.57; Mechanical 8 "ESP32-Devkit V1" at 105.06,55.07 h2.99 r270